# Altium PCB TK105_Hodetelefonforsterker.PcbDoc
Units mm, origin at the board's own origin, x right, y up, seen from the top; angles counter-clockwise.
Board outline 100 x 50 mm, 2 copper layers (Top Layer, Bottom Layer); 34 components, 32 nets, 129 pads, 5 vias.
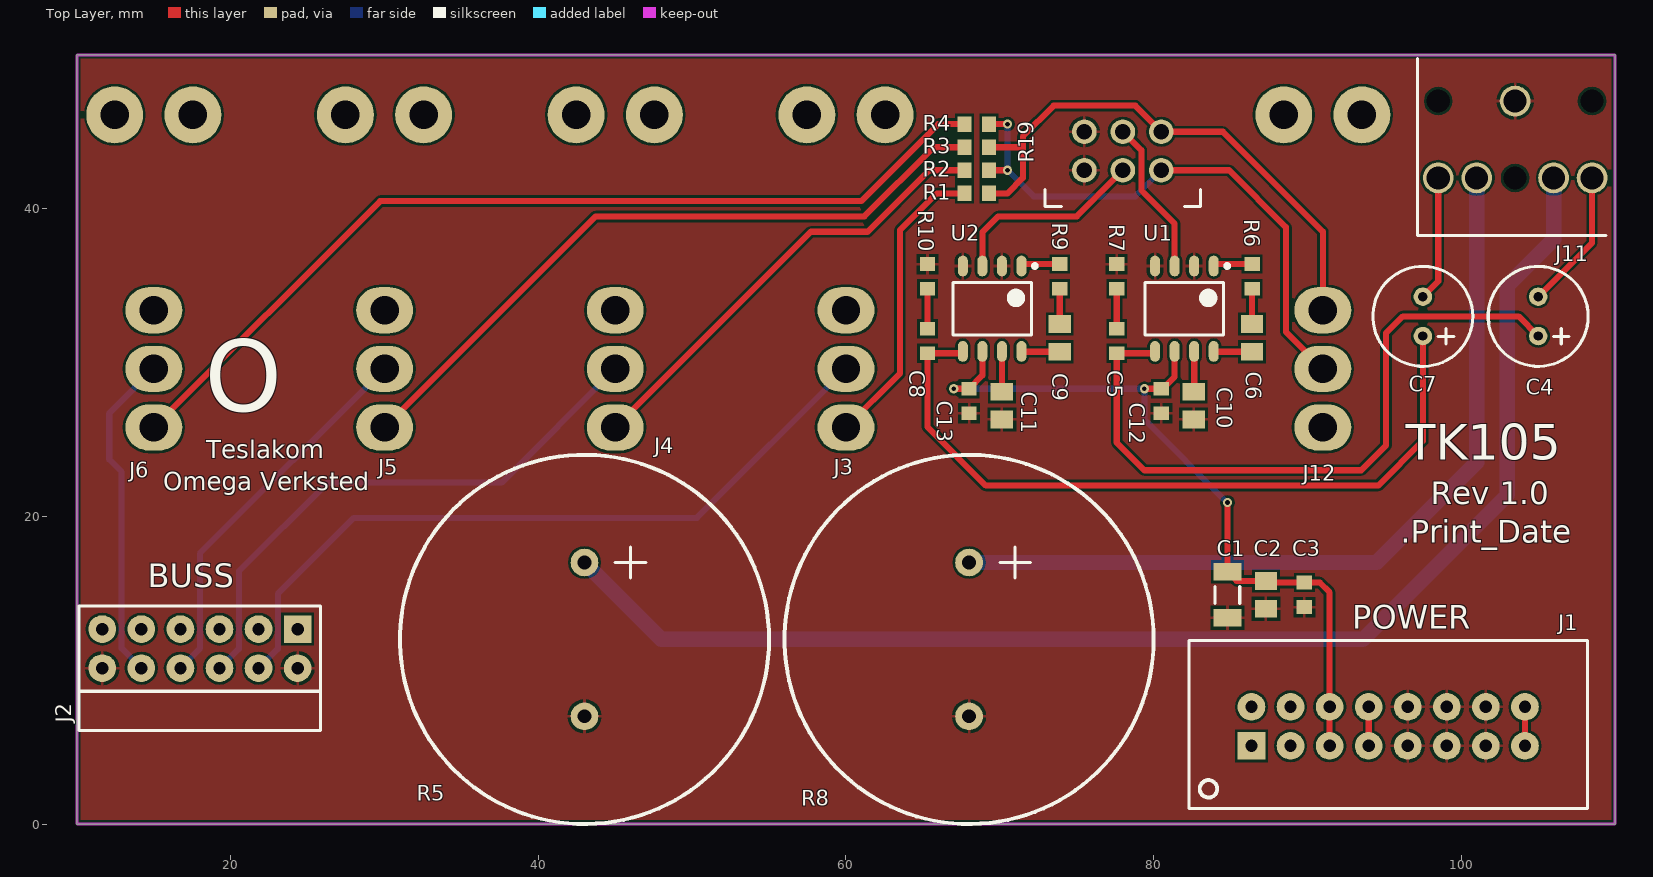
[diagram p0: Top Layer view]
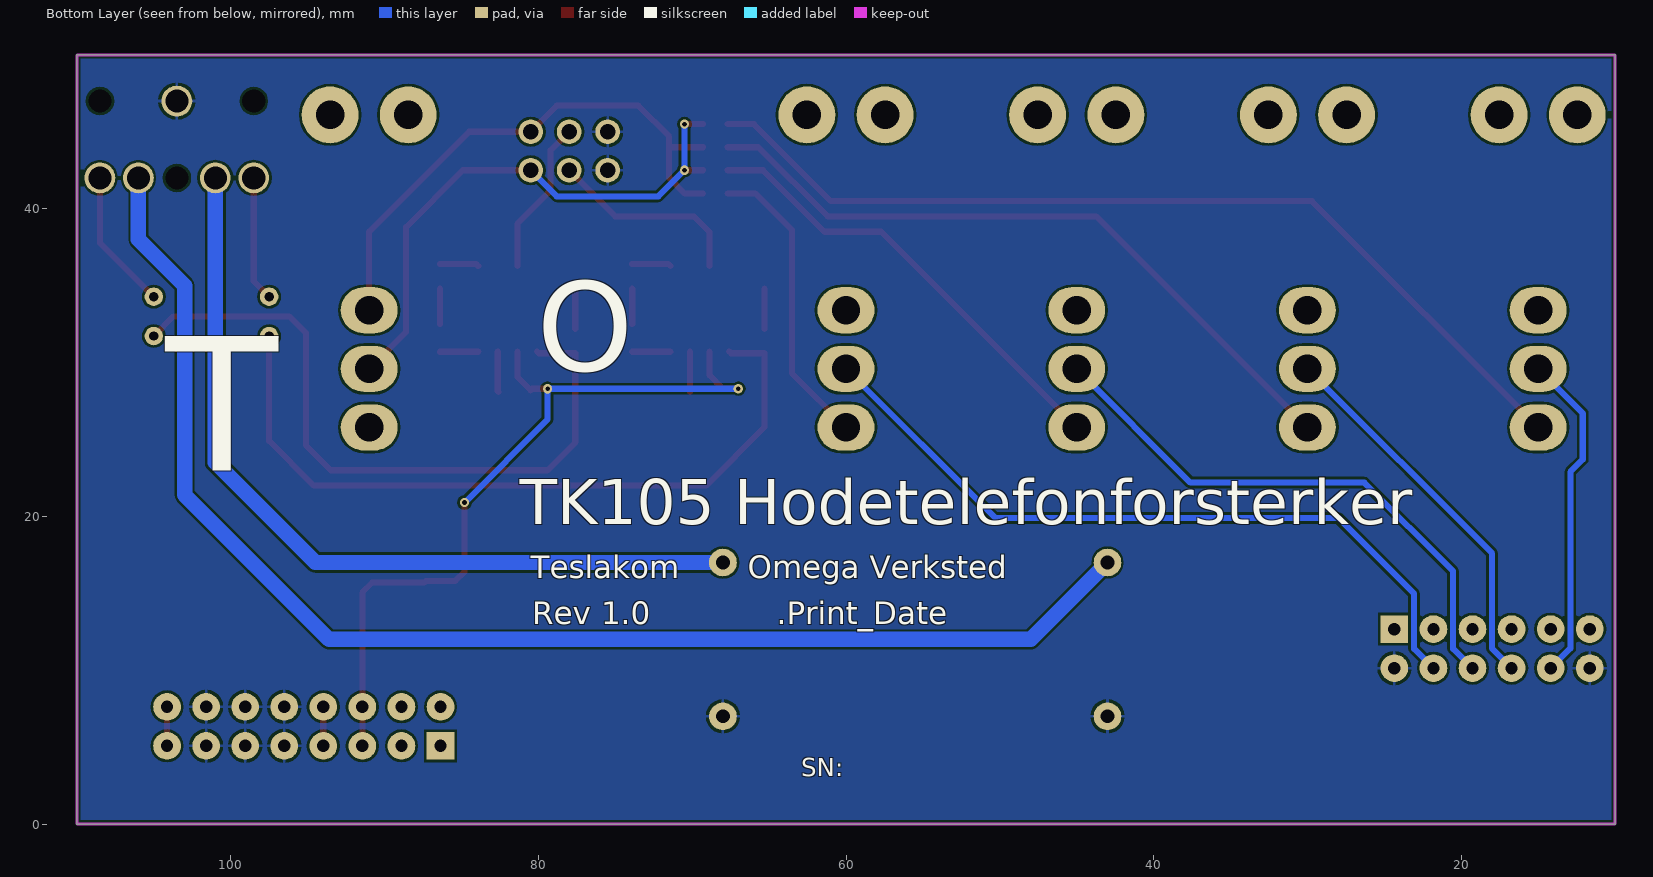
[diagram p1: Bottom Layer view, seen from below]

## Layer stack, top to bottom
Top Solder: solder mask 0.0102, Solder Resist, Dk 3.5
Top Layer: signal copper 0.0356
Dielectric 1: dielectric 0.32, FR-4, Dk 4.8
Bottom Layer: signal copper 0.0356
Bottom Solder: solder mask 0.0102, Solder Resist, Dk 3.5

## Board outline
10,0 10,50 110,50 110,0

## Design rules (kind name [scope] priority, off if disabled: settings)
Clearance [All] p1: gap=0.16 ignorepadtopadclearanceinfootprint=FALSE except(0: Arc-Text Arc-Hole Track-Text Track-Hole SMDPad-Text SMDPad-Hole THPad-Text THPad-Hole Via-Text Via-Hole Fill-Text Fill-Hole Poly-Text Poly-Hole Region-Text Region-Hole Text-Text Text-Hole)
Height [All] p1: minheight=0 maxheight=200 prefheight=12.7
HoleSize [All] p1: absolutevalues=TRUE maxlimit=6.35 minlimit=0.3 maxpercent=80.000 minpercent=20.000
MinimumSolderMaskSliver [All] p1: minsoldermaskwidth=0.1
PlaneClearance [All] p1: clearance=1
PlaneConnect [All] p1: planeconnectstyle=Relief reliefexpansion=0.508 reliefentries=4 reliefconductorwidth=1 reliefairgap=0.254
PolygonConnect PolygonConnect_1 [IsVia] p1: connectstyle=Direct reliefconductorwidth=0.254 reliefentries=4 polygonreliefangle="90 Angle" airgapwidth=0.254
PolygonConnect [All] p2: connectstyle=Relief reliefconductorwidth=0.2 reliefentries=4 polygonreliefangle="90 Angle" airgapwidth=0.2
RoutingVias [All] p1: holewidth=0.3 width=0.6 viastyle="Through Hole" minholewidth=0.3 minwidth=0.6 maxholewidth=6.35 maxwidth=10
SilkToSolderMaskClearance [IsPad] p1: minsilkscreentomaskgap=0.178 clearancetoexposedcopper=TRUE
SolderMaskExpansion [All] p1: expansion=0.1
Width [All] p1: maxlimit=10 minlimit=0.16 preferedwidth=0.4
24 further rules are at their usual default settings.

## Components (designator, comment, footprint, x,y, rotation, side; value= is the part's Value field where it differs from the comment)
C1 "4.7uF" CAPC1206(3216)170_N 84.8,14.9 r90 top
C2 "1uF" CAPC0805(2012)100_N 87.3,14.9 r90 top
C3 "100nF" CAPC0603(1608)55_N 89.8,14.9 r90 top
C4 "100uF" CAPPR25D06H11 105,33 r270 top
C5 "47nF" CAPC0603(1608)55_N 77.6,31.4 r270 top
C6 "10uF" CAPC0805(2012)100_N 86.4,31.6 r90 top
C7 "100uF" CAPPR25D06H11 97.5,33 r270 top
C8 "47nF" CAPC0603(1608)55_N 65.3,31.4 r270 top
C9 "10uF" CAPC0805(2012)100_N 73.9,31.6 r90 top
C10 "10uF" CAPC0805(2012)100_N 82.6,27.2 r90 top
C11 "10uF" CAPC0805(2012)100_N 70.135,27.2 r90 top
C12 "100nF" CAPC0603(1608)55_N 80.5,27.5 r90 top
C13 "100nF" CAPC0603(1608)55_N 68,27.5 r90 top
J1 "Header2x8" HDRV16W64P254_2X8_Shrouded 95.25,6.35 r90 top
J2 "Header2x6" HDRV12W64P254_2X6_RA 18,11.4 r270 top
J3 "Slide switch" 1MS1T2B4M7RE 60,33.4 r180 top locked
J4 "Slide switch" 1MS1T2B4M7RE 45,33.4 r180 top locked
J5 "Slide switch" 1MS1T2B4M7RE 30,33.4 r180 top locked
J6 "Slide switch" 1MS1T2B4M7RE 15,33.4 r180 top locked
J11 "3.5mm jack" PJ-306M 103.5,47 r0 top locked
J12 "Slide switch" 1MS1T2B4M7RE 91,33.4 r180 top locked
R1 "4k7" RESC0603(1608)_N 68.5,41 r0 top
R2 "4k7" RESC0603(1608)_N 68.5,42.5 r0 top
R3 "4k7" RESC0603(1608)_N 68.5,44 r0 top
R4 "4k7" RESC0603(1608)_N 68.5,45.5 r0 top
R5 "KSSG2308" KSSG2308 43,12 r0 top locked
R6 "1k2" RESC0603(1608)_N 86.4,35.6 r90 top
R7 "10R" RESC0603(1608)_N 77.6,35.6 r270 top
R8 "KSSG2308" KSSG2308 68,12 r0 top locked
R9 "1k2" RESC0603(1608)_N 73.9,35.6 r90 top
R10 "10R" RESC0603(1608)_N 65.3,35.6 r270 top
R19 "RK0971220" RK0971220 78,45 r90 top locked
U1 "LM386" SOIC127P590X363-8N 82,33.5 r270 top
U2 "LM386" SOIC127P590X363-8N 69.5,33.5 r270 top

## Footprints (in the part's own frame and the unit in brackets; to place one, negate y for a bottom-side part, rotate by r counter-clockwise, add the part's x,y. Pads: shape width x height; smd on the part's side, far side on the other; paste and mask are expansions set on the pad)
1MS1T2B4M7RE [mm]
  round 3.7 hole 1.85: 0(-2.54,-12.7) 0(2.54,-12.7)
  oval 3.7x3 hole 1.85: 1(0,0) 2(0,3.81) 3(0,7.62)
  body extent -3.36,-26.99 3.4,7.99, height 12.85
CAPC0603(1608)55_N [mm] "Chip Capacitor, Body 1.6x0.8mm, Height 0.55mm, IPC Medium Density"
  rect 0.9x1 smd: 1(-0.8,0) 2(0.8,0)
  body extent -0.87,-0.48 0.88,0.47, height 0.55
CAPC0805(2012)100_N [mm] "Chip Capacitor, Body 2.0x1.2mm, Height 1.0mm, IPC Medium Density"
  rect 1.15x1.45 smd: 1(-0.9,0) 2(0.9,0)
  body extent -1.1,-0.72 1.1,0.73, height 1
CAPC1206(3216)170_N [mm] "Chip Capacitor, Body 3.2x1.6mm, Height 1.7mm, IPC Medium Density"
  rect 1.15x1.8 smd: 1(-1.5,0) 2(1.5,0)
  silkscreen extent -0.55,-0.8 0.55,0.8, body extent -1.7,-0.9 1.7,0.9, height 1.7
CAPPR25D06H11 [mm]
  round 1.2 hole 0.6: 1(-1.28,0) 2(1.28,0)
  silkscreen extent -3.25,-3.25 3.25,3.25, body extent -3.15,-3.15 3.15,3.15, height 11.5
HDRV12W64P254_2X6_RA [mm] "Header 2x6 Right angle"
  rect 1.8x1.8 hole 0.8: 1(-1.27,6.35)
  round 1.8 hole 0.8: 2(1.27,6.35) 3(-1.27,3.81) 4(1.27,3.81) 5(-1.27,1.27) 6(1.27,1.27) 7(-1.27,-1.27) 8(1.27,-1.27) 9(-1.27,-3.81) 10(1.27,-3.81) 11(-1.27,-6.35) 12(1.27,-6.35)
  silkscreen extent -2.77,-7.85 5.31,7.85, body extent -1.61,-7.62 11.15,7.62, height 5.59
HDRV16W64P254_2X8_Shrouded [mm] "Header 2x8 Shrouded"
  rect 1.8x1.8 hole 0.8: 1(-1.27,8.89)
  round 1.8 hole 0.8: 2(1.27,8.89) 3(-1.27,6.35) 4(1.27,6.35) 5(-1.27,3.81) 6(1.27,3.81) 7(-1.27,1.27) 8(1.27,1.27) 9(-1.27,-1.27) 10(1.27,-1.27) 11(-1.27,-3.81) 12(1.27,-3.81) 13(-1.27,-6.35) 14(1.27,-6.35) 15(-1.27,-8.89) 16(1.27,-8.89)
  silkscreen extent -5.33,-12.95 5.59,12.95, body extent -4.44,-12.07 4.83,12.06, height 8.89
KSSG2308 [mm]
  round 1.8 hole 0.9: 1(0,5) 2(0,-5)
  silkscreen extent -12,-12 12,12, body extent -11.5,-11.5 11.5,11.5, height 8.4
PJ-306M [mm] "3.5mm Stereo jack"
  round 2 hole 1.5: 1(0,0) 2(5,-5) 3(2.5,-5) 4(-2.5,-5) 5(-5,-5)
  round 0 hole 1.5 unplated: ""(-5,0) ""(0,-5) ""(5,0)
  silkscreen extent -6.35,-8.75 5.9,2.75, body extent -6.1,-8.5 6.1,6.5, height 11
RESC0603(1608)_N [mm] "Chip Resistor, Body 1.6x0.8mm, IPC Medium Density"
  rect 0.9x1 smd: 1(-0.8,0) 2(0.8,0)
  body extent -0.85,-0.47 0.85,0.47, height 0.6
RK0971220 [mm] "Stereo logarithmic potmeter"
  round 1.6 hole 1: 1(0,-2.5) 2(0,0) 3(0,2.5) 4(-2.5,-2.5) 5(-2.5,0) 6(-2.5,2.5)
  silkscreen extent -4.85,-5.05 -3.75,5.05, body extent -4.55,-4.75 20,4.75, height 11.35
SOIC127P590X363-8N [mm] "SOIC, 8-Leads, Body 4,88x3,91mm, Pitch 1,27mm, IPC Medium Density"
  oval 1.35x0.65 smd: 1(-2.775,1.905) 2(-2.775,0.635) 3(-2.775,-0.635) 4(-2.775,-1.905) 5(2.775,-1.905) 6(2.775,-0.635) 7(2.775,0.635) 8(2.775,1.905)
  silkscreen extent -2.9,-2.55 1.7,2.91, body extent -3.1,-2.5 3.1,2.5, height 1.75

## Part data
C1: library part 2992, "X7R 50V", id=2992, navn=4.7uF, nokkelord="Kondensator, capacitor", pakke_opprettet="11.02.2015 13.21.22", pakke_opprettet_av=815, pakketype=1206, pris=1, produsent=Multikomp, symbol_opprettet="14.11.2014 20.19.34", symbol_opprettet_av=815
C2: library part 3582, "X7R 50V 10%", id=3582, leverandor=Farnell, leverandor_varenr=1735541, navn=1uF, nokkelord="Kondensator, capacitor", pakke_opprettet="14.11.2014 20.52.01", pakke_opprettet_av=815, pakketype=0805, pris=4, produsent=Murata, symbol_opprettet="14.11.2014 20.19.34", symbol_opprettet_av=815
C3: library part 3028, "X7R 50V 5%", id=3028, leverandor=Farnell, leverandor_varenr=1759122, navn=100nF, nokkelord="Kondensator, Capacitor, CAP", pakke_opprettet="18.02.2015 14.18.13", pakke_opprettet_av=815, pakketype=0603, pris=1, produsent=Multikomp, symbol_opprettet="14.11.2014 20.19.34", symbol_opprettet_av=815
C4 C7: library part 4858, "25V 2.5mm pitch", antall=40, dybde=1, hylle=4, id=4858, komponenttype=2, lager_type=Fremlager, leverandor=Farnell, leverandor_varenr=1848439, navn=100uF, nokkelord="Cap, Kondensator", pakke_opprettet="28/06/2014 17:35:52", pakke_opprettet_av=815, pakketype=CAPPR, pris=2, produsent=Panasonic, rad=7, rom=OV, symbol_opprettet="28/06/2014 15:26:13", symbol_opprettet_av=815
C5 C8: library part 5656, "X7R 50V 5%", id=5656, komponenttype=2, leverandor=Farnell, leverandor_varenr=1759116, navn=47nF, nokkelord="Kondensator, Capacitor, CAP", pakke_opprettet="18/02/2015 14:18:13", pakke_opprettet_av=815, pakketype=0603, pris=1, produsent=Multikomp, symbol_opprettet="14/11/2014 20:19:34", symbol_opprettet_av=815
C6 C9 C10 C11: library part 3114, "X5R 6.3V 10%", id=3114, komponenttype=2, leverandor=Farnell, leverandor_varenr=2320852, navn=10uF, pakke_opprettet="14/11/2014 20:52:01", pakke_opprettet_av=815, pakketype=0805, pris=0, symbol_opprettet="14/11/2014 20:19:34", symbol_opprettet_av=815
C12 C13: library part 5152, "X7R 50V 5%", antall=1000, dybde=0, hylle=0, id=5152, komponenttype=2, lager_type=Baklager, leverandor=Farnell, leverandor_varenr=1759122, navn=100nF, nokkelord="Kondensator, Capacitor, CAP", pakke_opprettet="18/02/2015 14:18:13", pakke_opprettet_av=815, pakketype=0603, pris=1, produsent=Multikomp, rad=21, rom=OV, symbol_opprettet="14/11/2014 20:19:34", symbol_opprettet_av=815
J1: library part 4645, beskrivelse=Header, id=4645, navn="Header Shrouded 2X8P", nokkelord=Header, pakke_opprettet="2019-02-14 23:39:48", pakke_opprettet_av=815, pakketype=TH, pris=10, symbol_opprettet="2014-11-13 11:08:32", symbol_opprettet_av=815
J2: library part 4624, beskrivelse=Header, id=4624, komponenttype=11, navn="Header 2X6 Right Angle", nokkelord=Header, pakke_opprettet="16/02/2019 14:15:04", pakke_opprettet_av=815, pakketype=TH, pris=6, symbol_opprettet="13/11/2014 11:04:02", symbol_opprettet_av=815
J3 J4 J5 J6 J12: library part 4582, "Toggle Switch SPDT On-On", id=4582, leverandor=Farnell, leverandor_varenr=9473297, navn=1MS1T2B4M7RE, nokkelord="1M Series", pakke_opprettet="12/02/2019 23:53:13", pakke_opprettet_av=815, pakketype=TH, pris=36, produsent=Multicomp, symbol_opprettet="20/02/2017 18:08:19", symbol_opprettet_av=1335
J11: library part 3138, "5-pin 3.5mm 1/8\" Stereo Jack PCB Panel Mount", antall=0, beskrivelse="PCB panel mount PJ-306M", dybde=1, hylle=5, id=3138, komponenttype=11, lager_type=Fremlager, navn="3.5mm jack", nokkelord=PJ-306M, pakke_opprettet="16/11/2016 18:13:13", pakke_opprettet_av=1335, pakketype=TH, pris=5, produsent="CUI Inc.", rad=2, rom=OV, symbol_opprettet="16/11/2016 18:31:54", symbol_opprettet_av=1335
R1 R2 R3 R4: library part 5393, "0.1W 1% Thick film resistor", antall=100, dybde=64, hylle=2, id=5393, komponenttype=1, lager_type=Fremlager, navn=4k7, pakke_opprettet="08/07/2014 21:15:30", pakke_opprettet_av=815, pakketype=0603, pris=0, rad=-1, rom=OV, symbol_opprettet="08/07/2014 21:16:33", symbol_opprettet_av=815
R5 R8: library part 4630, "Speaker, Micro, 150 mW, 8 ohm, 1.5 kHz to 6 kHz", id=4630, leverandor=Farnell, leverandor_varenr=2215102, navn=KSSG2308, nokkelord=høyttaler, pakke_opprettet="18/02/2019 11:30:28", pakke_opprettet_av=815, pakketype=TH, pris=25, produsent=Kingstate, symbol_opprettet="18/02/2019 11:23:08", symbol_opprettet_av=815
R6 R9: library part 5024, "0.1W 1% Thick film resistor", antall=100, dybde=50, hylle=2, id=5024, komponenttype=1, lager_type=Fremlager, navn=1k2, pakke_opprettet="08/07/2014 21:15:30", pakke_opprettet_av=815, pakketype=0603, pris=0, rad=-1, rom=OV, symbol_opprettet="08/07/2014 21:16:33", symbol_opprettet_av=815
R7 R10: library part 5657, "0.1W 1% Thick film resistor", id=5657, komponenttype=1, navn=10R, pakke_opprettet="08/07/2014 21:15:30", pakke_opprettet_av=815, pakketype=0603, pris=0, symbol_opprettet="08/07/2014 21:16:33", symbol_opprettet_av=815
R19: library part 3059, "Stereo logarithmic potmeter", antall=100, dybde=0, hylle=0, id=3059, komponenttype=1, lager_type=Baklager, navn=RK0971220, nokkelord=potensiometer, pakke_opprettet="03/11/2016 16:35:58", pakke_opprettet_av=1335, pakketype=TH, pris=5, produsent=Alps, rad=2778, rom=GM, symbol_opprettet="03/11/2016 16:45:25", symbol_opprettet_av=1335
U1 U2: library part 3018, beskrivelse=Forsterker, id=3018, komponenttype=15, leverandor=Farnell, leverandor_varenr=3116862, navn=LM386, nokkelord="amp, headphone", pakke_opprettet="23/08/2014 14:54:32", pakke_opprettet_av=774, pakketype=SOIC, pris=0, produsent="Texas Instruments", symbol_opprettet="05/08/2019 20:42:43", symbol_opprettet_av=815

## Via types
v1: diameter 0.6, hole 0.3, Top Layer to Bottom Layer, tented both sides, 5 vias

## Nets (pads, with @x,y where several pads share a name; then routed paths per layer and width w, separated by ;. In a path a pad name is that pad's centre, name@x,y a point inside that pad or via, vN(x,y) a via of type N, cw(c..) or ccw(c..) an arc to the next point about the centre after c; other vN are vias at no path point)
4: J2.4 J3.2 | length 48.6
  Bottom Layer w0.4: J2.4@21.81,10.42 J2.4 23.07,11.39 23.07,14.97 28,19.9 50.31,19.9 J3.2
5: J2.6 J4.2 | length 36.7
  Bottom Layer w0.4: J2.6 20.53,11.39 20.53,16.43 26.3,22.2 37.61,22.2 J4.2
6: J2.8 J5.2 | length 25
  Bottom Layer w0.4: J2.8 18,11.4 18,17.59 J5.2
7: J2.10 J6.2 | length 21.5
  Bottom Layer w0.4: J2.10 12.91,11.41 12.91,22.89 12.1,23.7 12.1,26.69 J6.2
GND: C1.1 C2.1 C3.1 C10.1 C11.1 C12.1 C13.1 J1.9 J1.10 J1.11 J1.12 J1.13 J1.14 J2.2 J2.12 J11.1 R5.2 R7.1 R8.2 R10.1 R19.3 R19.6 U1.2 U1.4 U2.2 U2.4
NetC4_1: C4.1 J11.2 | length 9.2
  Top Layer w0.4: C4.1 108.5,37.78 J11.2
NetC4_2: C4.2 C5.2 U1.5 | length 45.4
  Top Layer w0.4: U1.5 79.97,30.6 C5.2 77.6,24.8 79.4,23 93.5,23 95.1,24.6 95.1,31.9 96.2,33 103.72,33 C4.2
NetC5_1: C5.1 R7.2 | length 2.6
  Top Layer w0.4: C5.1 R7.2
NetC6_1: C6.1 U1.8 | length 2.5
  Top Layer w0.4: U1.8 83.93,30.7 C6.1
NetC6_2: C6.2 R6.1 | length 2.3
  Top Layer w0.4: C6.2 R6.1
NetC7_1: C7.1 J11.5 | length 8.1
  Top Layer w0.4: C7.1 98.5,35.28 J11.5
NetC7_2: C7.2 C8.2 U2.5 | length 48.9
  Top Layer w0.4: U2.5 67.47,30.6 C8.2 65.3,25.8 69.1,22 94.6,22 97.5,24.9 C7.2
NetC8_1: C8.1 R10.2 | length 2.6
  Top Layer w0.4: C8.1 R10.2
NetC9_1: C9.1 U2.8 | length 2.5
  Top Layer w0.4: U2.8 71.43,30.7 C9.1
NetC9_2: C9.2 R9.1 | length 2.3
  Top Layer w0.4: C9.2 R9.1
NetC10_2: C10.2 U1.7 | length 2.6
  Top Layer w0.4: C10.2 82.635,28.135 U1.7
NetC11_2: C11.2 U2.7 | length 2.6
  Top Layer w0.4: C11.2 U2.7
NetJ3_3: J3.3 R1.1 | length 19.5
  Top Layer w0.4: J3.3 63.5,29.28 63.5,38.6 65.9,41 R1.1
NetJ4_3: J4.3 R2.1 | length 29.6
  Top Layer w0.4: J4.3 57.72,38.5 61.4,38.5 65.4,42.5 R2.1
NetJ5_3: J5.3 R3.1 | length 45.2
  Top Layer w0.4: J5.3 43.72,39.5 61.2,39.5 65.7,44 R3.1
NetJ6_3: J6.3 R4.1 | length 60.9
  Top Layer w0.4: J6.3 29.72,40.5 61,40.5 66,45.5 R4.1
NetJ11_3: J11.3 R5.1 | length 87.8
  Bottom Layer w1: R5.1 48,12 93.6,12 103,21.4 103,35 106,38 J11.3
NetJ11_4: J11.4 R8.1 | length 54.2
  Bottom Layer w1: R8.1 94.5,17 101,23.5 J11.4
NetJ12_1: J12.1 R1.2 R3.2 R19.1 | length 36.3
  Top Layer w0.4: R1.2 70.5,41 71.5,42 71.5,44 ; R3.2 71.5,44 ; J12.1 91,38.5 84.5,45 R19.1 78.8,46.7 73.5,46.7 71.5,44.7 71.5,44
NetJ12_2: J12.2 R2.2 R4.2 R19.4 | length 36.6
  Top Layer w0.4: R2.2 v1(70.5,42.5) ; R4.2 v1(70.5,45.5) ; R19.4 84.9,42.5 88.6,38.8 88.6,31.99 J12.2
  Bottom Layer w0.4: v1(70.5,45.5) v1(70.5,42.5) 72.2,40.8 78.8,40.8 R19.4
NetR6_2: R6.2 U1.1 | length 2.5
  Top Layer w0.4: U1.1 84.03,36.4 R6.2
NetR9_2: R9.2 U2.1 | length 2.5
  Top Layer w0.4: U2.1 71.53,36.4 R9.2
NetR19_2: R19.2 U1.3 | length 10.1
  Top Layer w0.4: R19.2 79.2,43.8 79.2,41.2 81.365,39.035 U1.3
NetR19_5: R19.5 U2.3 | length 13
  Top Layer w0.4: U2.3 68.865,38.465 69.9,39.5 75,39.5 R19.5
VCC_N12V: J1.15 J1.16 | length 2.5
  Top Layer w0.4: J1.15 J1.16
VCC_P5V0: C1.2 C2.2 C3.2 C12.2 C13.2 J1.5 J1.6 U1.6 U2.6 | length 51.5
  Top Layer w0.4: v1(67,28.3) C13.2 68.865,29.165 U2.6 ; v1(79.4,28.3) 80.4,28.3 80.5,28.2 81.365,29.065 U1.6 ; v1(84.8,20.9) C1.2 85.4,15.8 C2.2 87.4,15.7 C3.2 90.8,15.7 91.44,15.06 J1.6 J1.5
  Bottom Layer w0.4: v1(67,28.3) v1(79.4,28.3) 79.4,26.3 v1(84.8,20.9)
VCC_P12V: J1.7 J1.8 | length 2.5
  Top Layer w0.4: J1.7 J1.8
pads on no net: J1.1 J1.2 J1.3 J1.4 J2.1 J2.3 J2.5 J2.7 J2.9 J2.11 J3.0 J3.1 J4.0 J4.1 J5.0 J5.1 J6.0 J6.1 J11. J12.0 J12.3

## Polygon pours and split planes (outlines as drawn)
GND on Bottom Layer "GND" (solid, pour order 2): 10,0.2 10,49.8 110,49.8 110,0.2
GND on Top Layer "GND" (solid, pour order 0): 10,0.2 10,49.8 110,49.8 110,0.2

## Keep-outs
Keep-Out Layer:
  the board outline again, w0.2

## Other copper
Top Layer:
  region: 98.5,42

## Silkscreen, mask and mechanical layers (free items; w line width, h text height)
Top Overlay:
  text "O" at 18.3,25.3 h8
  text "Teslakom" at 18.4,23.4 h2
  text "TK105" at 96.4,22.9 h4
  text "Omega Verksted" at 15.6,21.3 h2
  text "Rev 1.0" at 98,20.3 h2.5
  text ".Print_Date" at 96.05,17.8 h2.5
  text "BUSS" at 14.6,15.4 h1.52
  text "POWER" at 92.9,12.689 h1.52
Bottom Overlay:
  text "O" at 80.1,27.5 h10
  text "T" at 96.9,20.1 h15
  text "TK105 Hodetelefonforsterker" at 81.2,18.5 h5
  text "Omega Verksted" at 66.4,15.5 h2.5
  text "Teslakom" at 80.5,15.5 h2.5
  text ".Print_Date" at 64.5,12.5 h2.5
  text "Rev 1.0" at 80.4,12.5 h2.5
  text "SN:" at 62.9,2.7 h2
Mechanical 1:
  the board outline again, w0.2